# EAGLE board Chime PCB v2.7 (EAGLE 9.6.2)
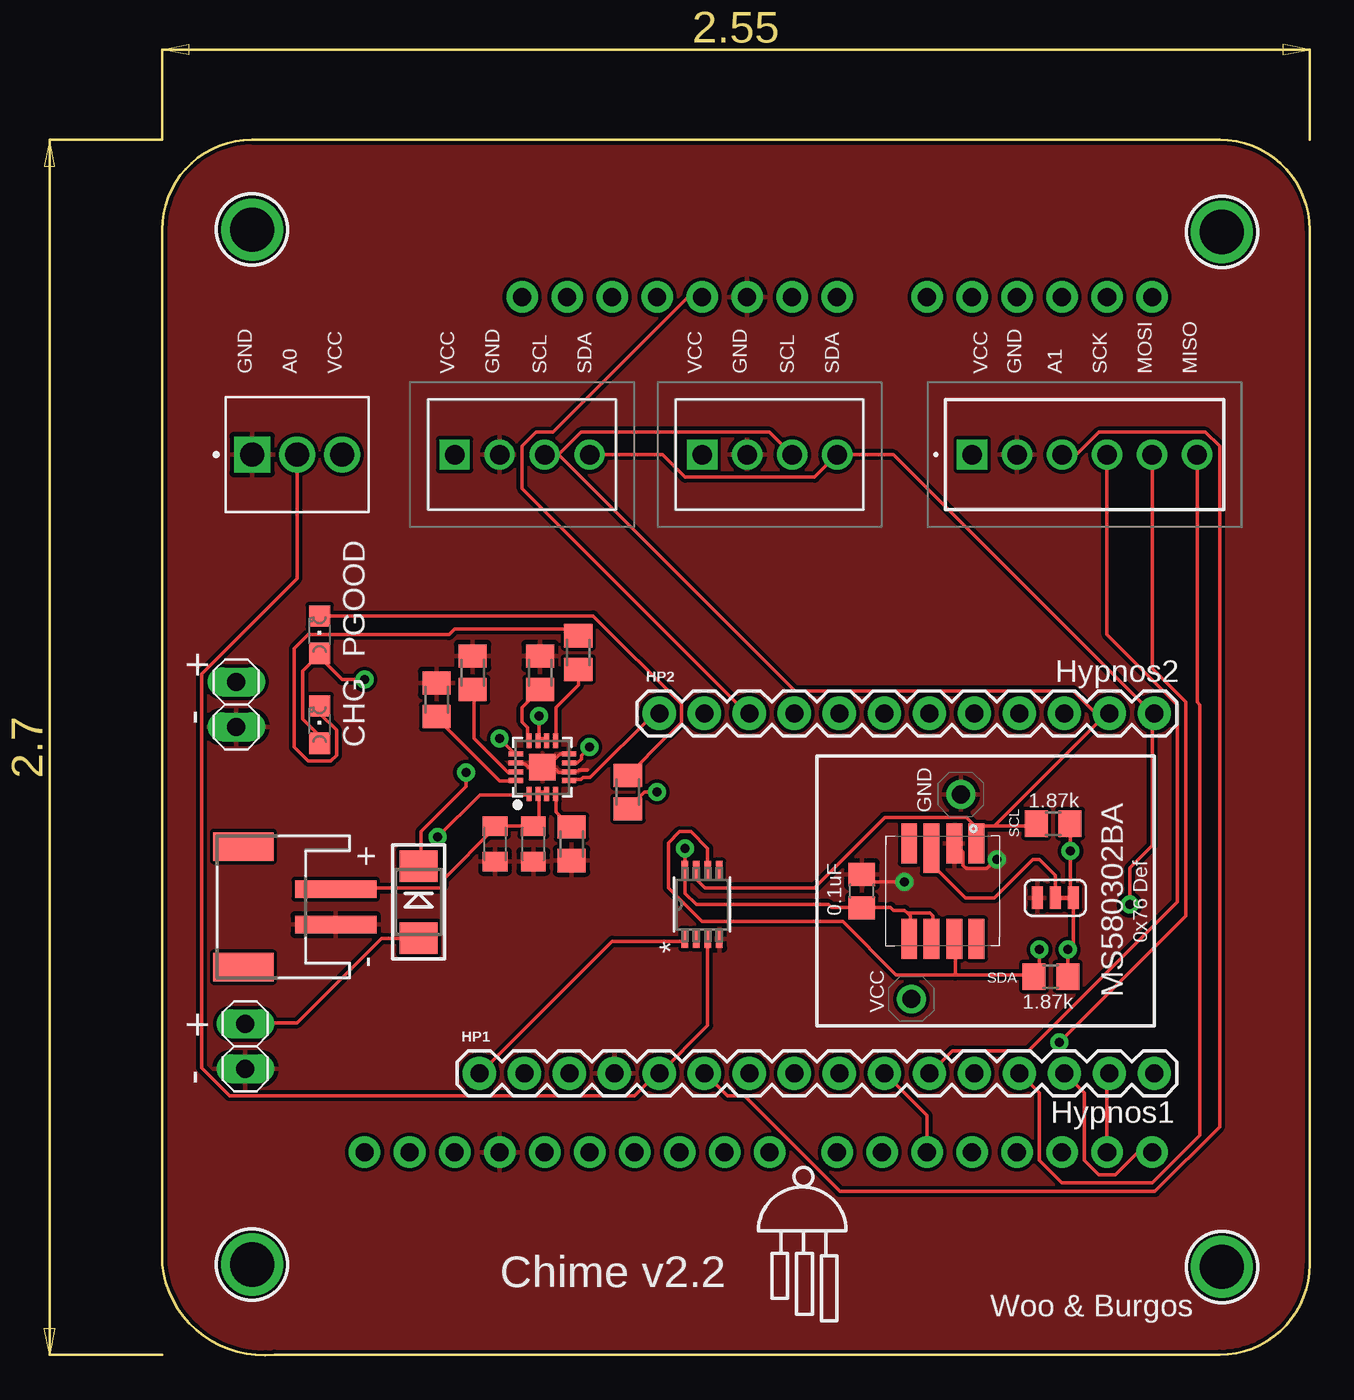
[diagram p0: board, top side]
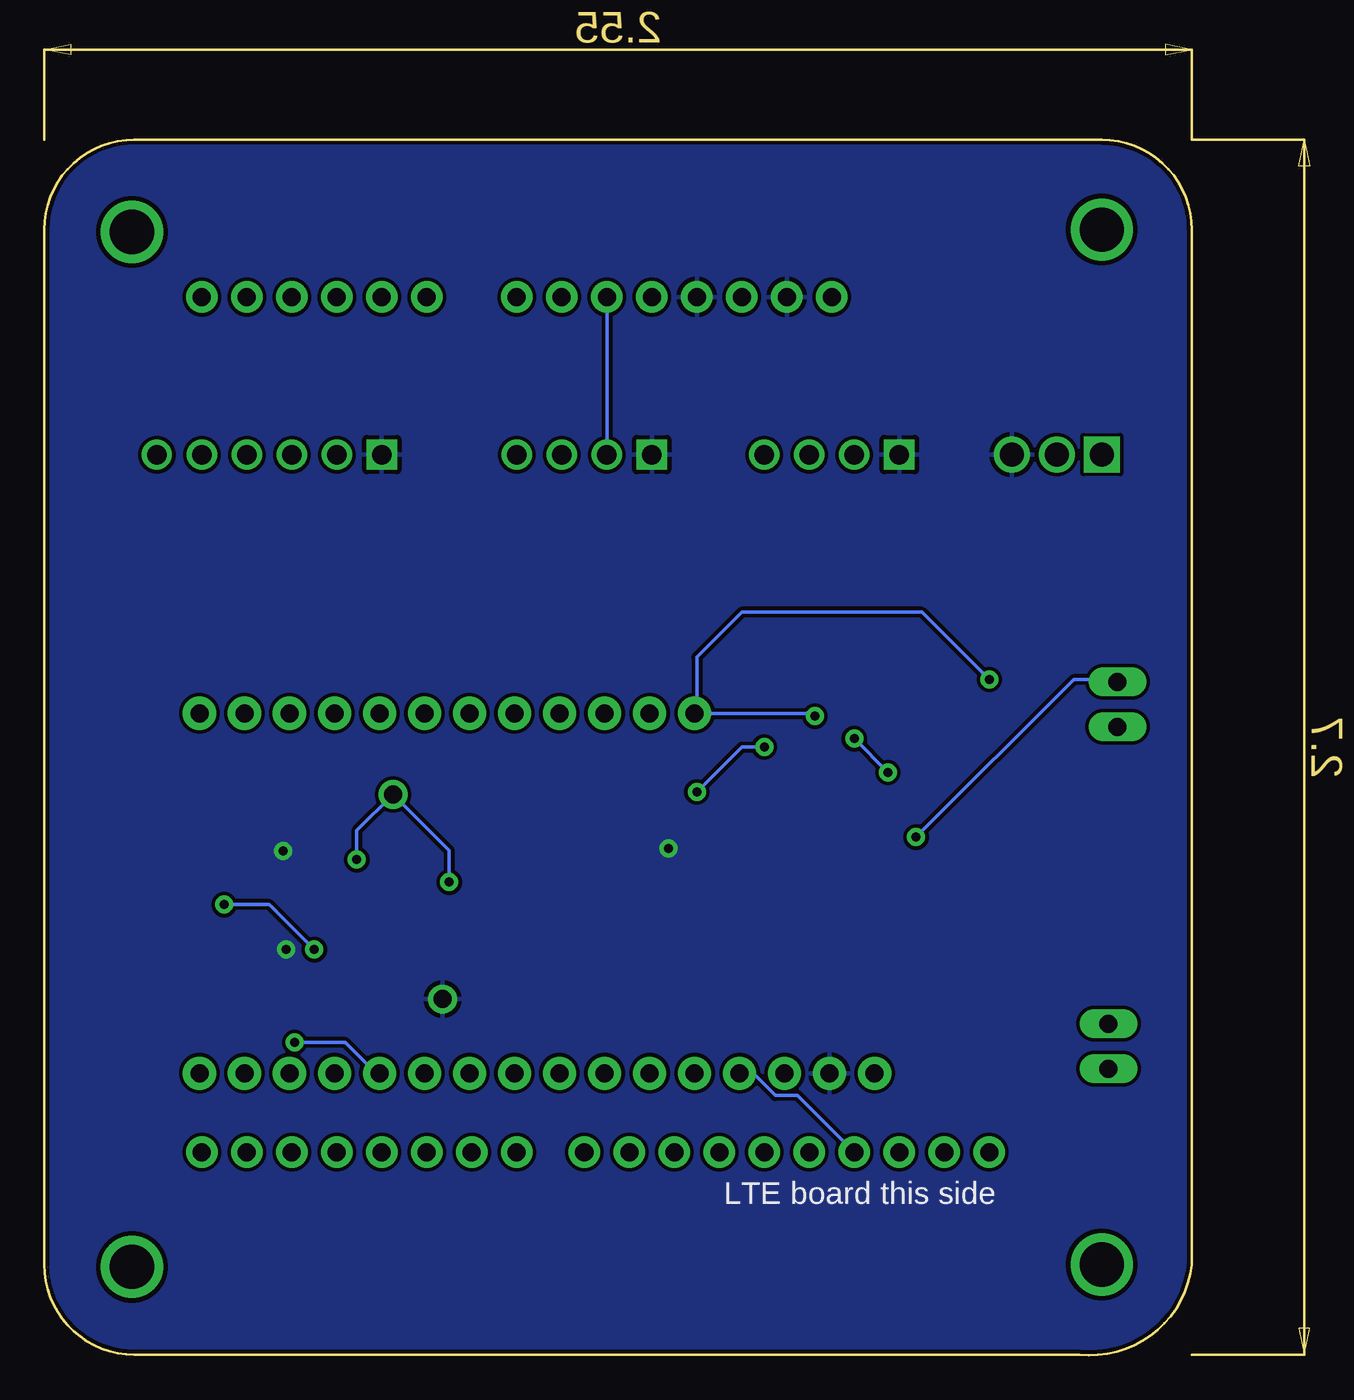
[diagram p1: board, bottom side, seen from below]

Size 64.77 x 68.61 mm. Coordinates in mm from the lower left corner, seen from the top.
Outline: 5.08,68.61 59.69,68.61 arc-90 64.77,63.53 64.77,5.11 arc-90 59.69,0.03 6.35,0.03 arc-90 0,5.11 0,63.53 arc-90 5.08,68.61
Copper layers (1*16): Top 0.035mm / dielectric 1.5mm / Bottom 0.035mm
Design rules "SparkFun": minimum track width 8mil, minimum drill 20mil, track to track 8mil, track to pad 8mil, pad to pad 8mil, via to via 8mil, smd to smd 8mil, copper to edge 8mil, drill to drill 8mil, minimum pad ring 12mil, minimum via ring 10mil, stop-mask expansion 4mil, vias tented up to drill 20mil, thermal gap 10mil

## Footprints (pad centres in the part's own frame; a part is rotated, then mirrored left to right if it is on the bottom)
JST-PH-2-SMT-RA = smd 1 x 4.6: 1 1,-3.7; 2 -1,-3.7 | smd 1.6 x 3.4: NC1 -3.4,1.5; NC2 3.4,1.5
C0805 = smd 1.3 x 1.5: 1 -0.95,0; 2 0.95,0
C0805K = smd 1.1 x 1.4: 1 -1,0; 2 1,0
CHIPLED_0805 = smd 1.2 x 1.2: A 0,-1.05; C 0,1.05
SMADIODE = smd 1.778 x 2.159: A 2.019,0; C -2.045,0
1X16 = drill 1.016 pad 1.88: 1 0,0; 2 2.54,0; 3 5.08,0; 4 7.62,0; 5 10.16,0; 6 12.7,0; 7 15.24,0; 8 17.78,0; 9 20.32,0; 10 22.86,0; 11 25.4,0; 12 27.94,0; 13 30.48,0; 14 33.02,0; 15 35.56,0; 16 38.1,0
1X12 = drill 1.016 pad 1.88: 1 0,0; 2 2.54,0; 3 5.08,0; 4 7.62,0; 5 10.16,0; 6 12.7,0; 7 15.24,0; 8 17.78,0; 9 20.32,0; 10 22.86,0; 11 25.4,0; 12 27.94,0
1725698 = drill 1.1 pad 1.65 square: 1 0,0 | drill 1.1 pad 1.65: 2 2.54,0; 3 5.08,0; 4 7.62,0; 5 10.16,0; 6 12.7,0
1725672 = drill 1.1 pad 1.65 square: 1 0,0 | drill 1.1 pad 1.65: 2 2.54,0; 3 5.08,0; 4 7.62,0
TE_282834-3 = drill 1.36 square: 1 0,0 | drill 1.36: 2 2.54,0; 3 5.08,0
1X01 = drill 1.016: 1 0,0
1X02 = drill 1.016 long: 1 -1.27,0; 2 1.27,0
R0805 = smd 1.3 x 1.5: 1 -0.95,0; 2 0.95,0
M0805 = smd 1.3 x 1.6: 1 -0.95,0; 2 0.95,0
SMT-JUMPER_3_1-NC_TRACE_SILK = smd 0.635 x 1.27: 1 -1.016,0; 2 0,0; 3 1.016,0
MS5803-02BA = smd 2.8 x 0.9: CSB 2.42,0.65 | smd 2.25 x 0.9: GND 2.7,-0.65; NC 2.7,1.9; PS -2.7,0.65; SCLK 2.7,-1.9; SDI/SDA -2.7,-0.65; SDO -2.7,-1.9; VDD -2.7,1.9
TMSOP08_2P9X2P8_ABL = smd 1.054 x 0.356: 1 -1.924,0.975; 2 -1.924,0.325; 3 -1.924,-0.325; 4 -1.924,-0.975; 5 1.924,-0.975; 6 1.924,-0.325; 7 1.924,0.325; 8 1.924,0.975
LTE_BOARD_FOOTPRINT = drill 1.016 pad 1.778: 0 35.56,48.26; 1 33.02,48.26; 2 30.48,48.26; 3 27.94,48.26; 3.3V 7.62,0; 4 25.4,48.26; 5 22.86,48.26; 5V 10.16,0; 6 20.32,48.26; 7 17.78,48.26; 8 13.97,48.26; 9 11.43,48.26; 10 8.89,48.26; 11 6.35,48.26; 12 3.81,48.26; 13 1.27,48.26; A0 22.86,0; A1 25.4,0; A2 27.94,0; A3 30.48,0; A4 33.02,0; A5 35.56,0; AREF -3.81,48.26; BLANK 0,0; GND 15.24,0; GND1 12.7,0; GND3 -1.27,48.26; IOREF 2.54,0; RST 5.08,0; SCL -8.89,48.26; SDA -6.35,48.26; VIN 17.78,0
MOUNTINGHOLE_2.5_PLATED = drill 2.5 pad 3.2: P$1 0,0
QFN16_3MM = smd 0.8 x 0.28: 1 -1.5,0.75; 2 -1.5,0.25; 3 -1.5,-0.25; 4 -1.5,-0.75; 9 1.5,-0.75; 10 1.5,-0.25; 11 1.5,0.25; 12 1.5,0.75 | smd 0.28 x 0.8: 5 -0.75,-1.5; 6 -0.25,-1.5; 7 0.25,-1.5; 8 0.75,-1.5; 13 0.75,1.5; 14 0.25,1.5; 15 -0.25,1.5; 16 -0.75,1.5 | smd 1.5 x 1.5: THERMAL 0,0

## Placement (x,y rotation side)
BATT  JST 2PH  [JST-PH-2-SMT-RA]  6.1,25.31 90 top
C1  0.1uF  [C0805]  39.5,26.2 90 top
C5  10uF  [C0805K]  20.95,28.86 270 top
C6  10uF  [C0805K]  18.8,28.86 270 top
CHG  [CHIPLED_0805]  8.89,35.59 0 top
D2  SK34A  [SMADIODE]  14.48,25.56 270 top
HP1  [1X16]  17.91,15.91 0 top
HP2  [1X12]  28.07,36.23 0 top
J1_SPI  1725698  [1725698]  45.72,50.83 0 top
J2_I2C  1725672  [1725672]  30.48,50.83 0 top
J2_I2C1  1725672  [1725672]  16.51,50.83 0 top
J5_A0  282834-3  [TE_282834-3]  5.08,50.83 0 top
JP4  VCC  [1X01]  42.29,20.1 90 top
JP5  GND  [1X01]  45.09,31.66 90 top
JP8  [1X02]  4.19,36.74 270 top
JP9  [1X02]  4.7,17.43 270 top
PGOOD  PGOOD  [CHIPLED_0805]  8.89,40.67 0 top
R1  1.87k  [R0805]  50.17,21.37 0 top
R2  1.87k  [R0805]  50.29,30.01 0 top
R3  1K  [M0805]  21.34,38.52 90 top
R4  1K  [M0805]  17.53,38.52 90 top
R7  1K  [M0805]  23.5,39.66 90 top
R8  10K  [M0805]  23.11,28.86 270 top
R9  1K  [M0805]  15.49,36.99 90 top
R11  1K  [M0805]  26.29,31.78 90 top
SJ1  JUMPER-SMT_3_1-NC_TRACE_SILK  [SMT-JUMPER_3_1-NC_TRACE_SILK]  50.42,25.82 0 top
U1  MS5803-02BA  [MS5803-02BA]  44.07,26.2 90 top
U2  S-35770E01I-K8T2U  [TMSOP08_2P9X2P8_ABL]  30.48,25.43 90 top
U$1  LTE_BOARD  [LTE_BOARD_FOOTPRINT]  20.32,59.72 180 bottom
U$2  MOUNTINGHOLE2.5  [MOUNTINGHOLE_2.5_PLATED]  5.08,5.11 0 top
U$3  MOUNTINGHOLE2.5  [MOUNTINGHOLE_2.5_PLATED]  5.08,63.53 0 top
U$4  MOUNTINGHOLE2.5  [MOUNTINGHOLE_2.5_PLATED]  59.82,63.41 0 top
U$5  MOUNTINGHOLE2.5  [MOUNTINGHOLE_2.5_PLATED]  59.82,4.99 0 top
X4  BQ24074  [QFN16_3MM]  21.46,33.18 90 top

## Library data of the parts
BATT C5 C6 CHG PGOOD R3 R4 R7-R9 R11 = adafruit
C1 = rcl; SPICEPREFIX: C
D2 = microbuilder
HP1 HP2 = SparkFun-Connectors
J1_SPI = 1725698; ARROW_PART_NUMBER: 1725698; ARROW_PRICE-STOCK: https://www.arrow.com/en/products/1725698/phoenix-contact?region=nac; DESCRIPTION: Conn PC Terminal Block 6 POS 2.54mm Solder ST Thru-Hole 6A; HEIGHT: 8.65mm; MANUFACTURER_NAME: Phoenix Contact; MANUFACTURER_PART_NUMBER: 1725698; MOUSER_PART_NUMBER: 651-1725698; MOUSER_PRICE-STOCK: https://www.mouser.co.uk/ProductDetail/Phoenix-Contact/1725698?qs=Ul7CXFMnlWUIR3VpVwwC4A%3D%3D
J2_I2C J2_I2C1 = 1725672; ARROW_PART_NUMBER: 1725672; ARROW_PRICE-STOCK: https://www.arrow.com/en/products/1725672/phoenix-contact?region=nac; DESCRIPTION: 4 way vertical PCB terminal,6A 63V Phoenix Contact Non-Fused Terminal Block, 4 Way, Solder Terminals, 26 ??? 20 AWG Through Hole, Nylon, 63 V; HEIGHT: 8.65mm; MANUFACTURER_NAME: Phoenix Contact; MANUFACTURER_PART_NUMBER: 1725672; MOUSER_PART_NUMBER: 651-1725672; MOUSER_PRICE-STOCK: https://www.mouser.co.uk/ProductDetail/Phoenix-Contact/1725672?qs=Ul7CXFMnlWXX93F9bOV2pQ%3D%3D
J5_A0 = Fixed Terminal Blocks 3P; AVAILABILITY: In Stock; COMMENT: 282834-3; DESCRIPTION: 3 Position Wire to Board Terminal Block Horizontal with Board 0.100 (2.54mm); EU_ROHS_COMPLIANCE: Compliant with Exemptions; MF: TE Connectivity; MP: 282834-3; PACKAGE: None; PRICE: None; PURCHASE-URL: https://pricing.snapeda.com/search/part/282834-3/?ref=eda
JP4 JP5 = pinhead_simple
JP8 JP9 = pinhead
R1 R2 = rcl; SPICEPREFIX: R
SJ1 = SparkFun-Jumpers
U1 = PNNL_Probe
U2 = S-35770 COUNTER; COPYRIGHT: Copyright (C) 2023 Ultra Librarian. All rights reserved.; MANUFACTURER_PART_NUMBER: S-35770E01I-K8T2U; MFR_NAME: ABLIC
U$1 = LTE_BOARD_LOOM
U$2-U$5 = microbuilder; BOM: EXCLUDE
X4 = adafruit_power

## Nets
3VSWITCH: HP2.10
4GONOFF: HP1.10 U$1.5
5VRAIL: HP2.3 U$1.5V
5VSWITCH: HP2.9
!CE: R8.1 X4.4
!CHG: R7.1 X4.9
!PGOOD: R11.1 X4.7
A0: HP1.5 J5_A0.2 U2.3
A1: HP1.6 J1_SPI.3
A2: HP1.7
A3: HP1.8
AREF: HP1.3
CHARGER_IN: D2.A JP9.1
EN: HP2.2
GND: BATT.2 C1.2 C5.2 C6.2 HP1.4 J1_SPI.2 J2_I2C1.2 J2_I2C.2 J5_A0.1 JP5.1 JP8.2 JP9.2 R3.2 R4.2 R8.2 R9.2 SJ1.1 U1.GND U2.4 U$1.GND1 U$1.GND3 X4.6 X4.8 X4.14 X4.THERMAL
ILIM: R3.1 X4.12
ISET: R9.1 X4.16
ITERM: R4.1 X4.15
MISO: HP1.13 J1_SPI.6
MOSI: HP1.12 J1_SPI.5
N$2: D2.C X4.13
N$3: SJ1.2 U1.CSB
N$4: PGOOD.C R11.2
N$5: CHG.C R7.2
P9: HP2.8
P10: HP2.7
P11: HP2.6
P12: HP2.5
P13: HP2.4
PGOOD: HP1.9
RST: HP1.1 U2.1
RX: HP1.14 U$1.0
SCK: HP1.11 J1_SPI.4
SCL: HP2.11 J2_I2C1.3 J2_I2C.3 R2.1 U1.SCLK U2.7
SDA: HP2.12 J2_I2C1.4 J2_I2C.4 R1.1 U1.SDI/SDA U2.6
SPEC: HP1.16
THERM: JP8.1 X4.1
TX: HP1.15 U$1.1
VBAT: CHG.A HP2.1 PGOOD.A X4.5 X4.10 X4.11
VCC: C1.1 HP1.2 J1_SPI.1 J2_I2C1.1 J2_I2C.1 J5_A0.3 JP4.1 R1.2 R2.2 SJ1.3 U1.PS U1.VDD U2.8 U$1.3.3V U$1.IOREF
VLIPO: BATT.1 C5.1 C6.1 X4.2 X4.3

## Tracks (layer width: path | path; a pad name or v marks a point on that pad's centre or on a via)
4GONOFF
  Top 0.203: U$1.5 43.18,13.53 40.8,15.91 HP1.10
5VRAIL
  Top 0.203: U$1.5V 29.69,59.72 22.07,52.1 21.11,52.1 20.32,51.31 20.32,48.93 33.02,36.23 HP2.3
!CE
  Top 0.203: X4.4 22.22,31.63 22.22,30.67 23.02,29.88 R8.1
!CHG
  Top 0.203: R7.1 23.5,37.82 22.22,36.55 22.22,34.8 X4.9
!PGOOD  (via drill 0.51)
  Top 0.203: R11.1 27.24,31.78 v27.94,31.78 | v24.13,34.32 23.67,33.86 23.67,33.67 23.43,33.43 X4.7
  Bottom 0.203: v27.94,31.78 25.4,34.32 v24.13,34.32
A0
  Top 0.203: U2.3 30.8,23.37 30.8,18.61 28.1,15.91 HP1.5 27.94,15.91 26.67,14.64 3.81,14.64 2.22,16.23 2.22,38.45 7.62,43.85 J5_A0.2
A1
  Top 0.203: J1_SPI.3 51.59,50.83 52.86,52.1 58.9,52.1 59.69,51.31 59.69,12.89 56.04,9.24 38.26,9.24 32.86,14.64 31.91,14.64 30.64,15.91 HP1.6
CHARGER_IN
  Top 0.203: D2.A 14.45,23.53 12.38,23.53 7.62,18.77 4.76,18.77 JP9.1
GND  (via drill 0.51)
  Top 0.203: 21.59,33.05 22.22,33.05 22.38,32.9 22.86,32.9 X4.6 23.02,32.99 23.49,32.99 23.53,33.03 24,33.03 | 21.59,33.05 X4.THERMAL 20.68,33.18 20.49,33.38 20.02,33.38 X4.14 | v41.91,26.7 39.94,26.7 C1.2 | U1.GND 45.21,28.4 45.21,27.65 45.39,27.47 46.55,27.47 47.05,27.97 v47.13,27.97 | X4.8 22.47,33.93 21.59,33.05
  Bottom 0.203: U$1.GND3 22.25,14.66 23.5,14.66 24.75,15.91 HP1.4 | U$1.GND1 J2_I2C.2 | v41.91,26.7 41.91,28.48 JP5.1 47.13,29.61 v47.13,27.97
  pour Top: 0,68.61 64.77,68.61 64.77,0.03 0,0.03
ILIM
  Top 0.203: X4.12 20.64,34.8 20.64,35.44 20.32,35.75 20.32,36.55 21.27,37.5 R3.1
ISET
  Top 0.203: X4.16 19.84,32.42 19.05,32.42 15.56,35.91 R9.1
ITERM
  Top 0.203: X4.15 19.84,32.9 19.53,32.9 17.62,34.8 17.62,37.5 R4.1
MISO
  Top 0.203: J1_SPI.6 58.42,36.86 58.58,36.71 58.58,12.42 55.88,9.72 50.8,9.72 49.53,10.99 49.53,14.8 48.42,15.91 HP1.13
MOSI  (via drill 0.51)
  Top 0.203: J1_SPI.5 55.88,38.77 57.79,36.86 57.79,24.8 v50.64,17.66
  Bottom 0.203: v50.64,17.66 47.78,17.66 46.04,15.91 HP1.12
N$2  (via drill 0.51)
  Top 0.203: v19.05,34.8 19.84,34.01 X4.13 | v17.14,32.9 17.14,32.1 14.61,29.56 14.61,27.66 D2.C
  Bottom 0.203: v17.14,32.9 v19.05,34.8
N$3
  Top 0.203: U1.CSB 43.42,27.74 45.34,25.82 46.99,25.82 49.15,27.97 49.53,27.97 50.42,27.09 SJ1.2
N$4
  Top 0.203: R11.2 28.54,34.98 28.58,34.98 29.31,35.71 29.31,36.75 24.33,41.72 PGOOD.C
N$5
  Top 0.203: CHG.C 8.89,36.23 9.84,35.28 9.84,33.85 9.53,33.53 8.26,33.53 7.46,34.32 7.46,39.88 8.26,40.67 16.19,40.67 16.51,40.99 23.18,40.99 23.5,40.67 R7.2
RST
  Top 0.203: U2.1 29.37,23.37 25.4,23.37 17.94,15.91 HP1.1
RX
  Top 0.203: U$1.0 55.09,11.46 53.82,10.19 52.86,10.19 52.07,10.99 52.07,14.8 50.96,15.91 HP1.14
SCK
  Top 0.203: J1_SPI.4 53.34,40.67 57.31,36.71 57.31,25.59 48.9,17.18 44.61,17.18 43.34,15.91 HP1.11
SCL
  Top 0.203: 22.38,50.83 23.65,52.1 34.29,52.1 J2_I2C.3 | 45.88,29.88 45.4,30.36 40.8,30.36 36.83,26.39 30.64,26.39 30.16,26.86 30.16,27.34 U2.7 | 45.88,29.88 45.88,28.93 U1.SCLK 45.88,29.88 | 45.88,29.88 46.99,29.88 | 46.99,29.88 49.21,29.88 R2.1 | 46.99,29.88 53.02,35.91 | 53.02,35.91 53.34,36.23 HP2.11 53.02,35.91 | 22.38,50.83 35.72,37.5 51.44,37.5 53.02,35.91 | 22.38,50.83 J2_I2C1.3
SDA  (via drill 0.51)
  Top 0.203: J2_I2C1.4 28.26,50.83 29.53,49.56 36.83,49.56 J2_I2C.4 41.28,50.83 55.88,36.23 | 44.77,21.47 49.21,21.47 R1.1 49.53,21.69 v49.53,22.89 | 44.77,21.47 41.43,21.47 38.42,24.48 30.48,24.48 28.57,26.39 28.57,28.93 29.21,29.56 29.84,29.56 30.8,28.61 30.8,27.5 U2.6 | 44.77,21.47 44.77,23.37 U1.SDI/SDA | 55.88,36.23 55.88,28.77 54.61,27.5 v54.61,25.43 | 55.88,36.23 HP2.12
  Bottom 0.203: v49.53,22.89 52.07,25.43 v54.61,25.43
THERM  (via drill 0.51)
  Top 0.203: v15.56,29.24 17.94,31.63 20.64,31.63 X4.1
  Bottom 0.203: v15.56,29.24 6.67,38.13 4.29,38.13 JP8.1
TX
  Top 0.203: U$1.1 53.34,15.91 HP1.15
VBAT  (via drill 0.51)
  Top 0.203: CHG.A 8.89,34.96 7.94,35.91 7.94,38.61 8.81,39.48 | 8.81,39.48 8.89,39.56 PGOOD.A | 21.27,34.8 21.59,34.8 X4.10 | HP2.1 27.78,36.23 24.15,32.6 23.75,32.6 23.64,32.49 23.02,32.49 X4.5 | v21.27,36.07 21.27,34.8 | 21.27,34.8 X4.11 | 8.81,39.48 10.16,38.13 v11.43,38.13
  Bottom 0.203: HP2.1 27.94,36.23 | 27.94,36.23 21.43,36.23 v21.27,36.07 | v11.43,38.13 15.24,41.94 25.4,41.94 27.94,39.4 27.94,36.23
VCC  (via drill 0.51)
  Top 0.203: v29.53,28.61 29.53,27.5 U2.8 29.53,27.34 29.53,26.07 30.16,25.43 37.62,25.43 37.78,25.28 39.37,25.28 C1.1 39.53,25.28 41.12,25.28 41.28,25.12 41.91,25.12 42.07,24.96 | R1.2 51.12,21.47 v51.12,22.89 51.44,23.21 SJ1.3 | R2.2 51.28,29.88 v51.28,28.45 51.28,26.41 51.44,26.25 | 42.07,24.96 42.23,24.8 42.23,23.53 U1.VDD | 42.07,24.96 43.34,24.96 43.5,24.8 43.5,23.53 U1.PS
  pour Bottom: 0,68.61 64.77,68.61 64.77,0.03 0,0.03
VLIPO
  Top 0.203: X4.3 21.59,31.78 21.27,31.78 X4.2 21.27,31.63 21.27,30.2 20.95,29.88 | 20.95,29.88 18.89,29.88 C6.1 18.73,29.72 15.88,26.86 15.88,26.55 15.72,26.39 9.84,26.39 BATT.1 | 20.95,29.88 C5.1

## Text on the board
tPlace: GND | A0 | VCC | VCC | GND | SCL | SDA | VCC | GND | SCL | SDA | VCC | GND | A1 | SCK | MOSI | MISO | Hypnos2 | 1.87k | GND | SCL | 0.1uF | 0x76 Def | SDA | 1.87k | MS580302BA | VCC | Hypnos1 | Chime v2.2 | Woo & Burgos
tNames: + | - | + | -
bNames: LTE board this side